# Altium PCB 3_iip_quad_uart.PcbDoc (part 2 of 2)
Units mm, origin at the board's own origin, x right, y up, seen from the top; angles counter-clockwise.
Board outline 82.5 x 28 mm, 2 copper layers (Top Layer, Bottom Layer), stack 1.571 mm thick; 55 components, 29 nets, 180 pads, 29 vias.
Unrouted connection lines stored in the file: 1.
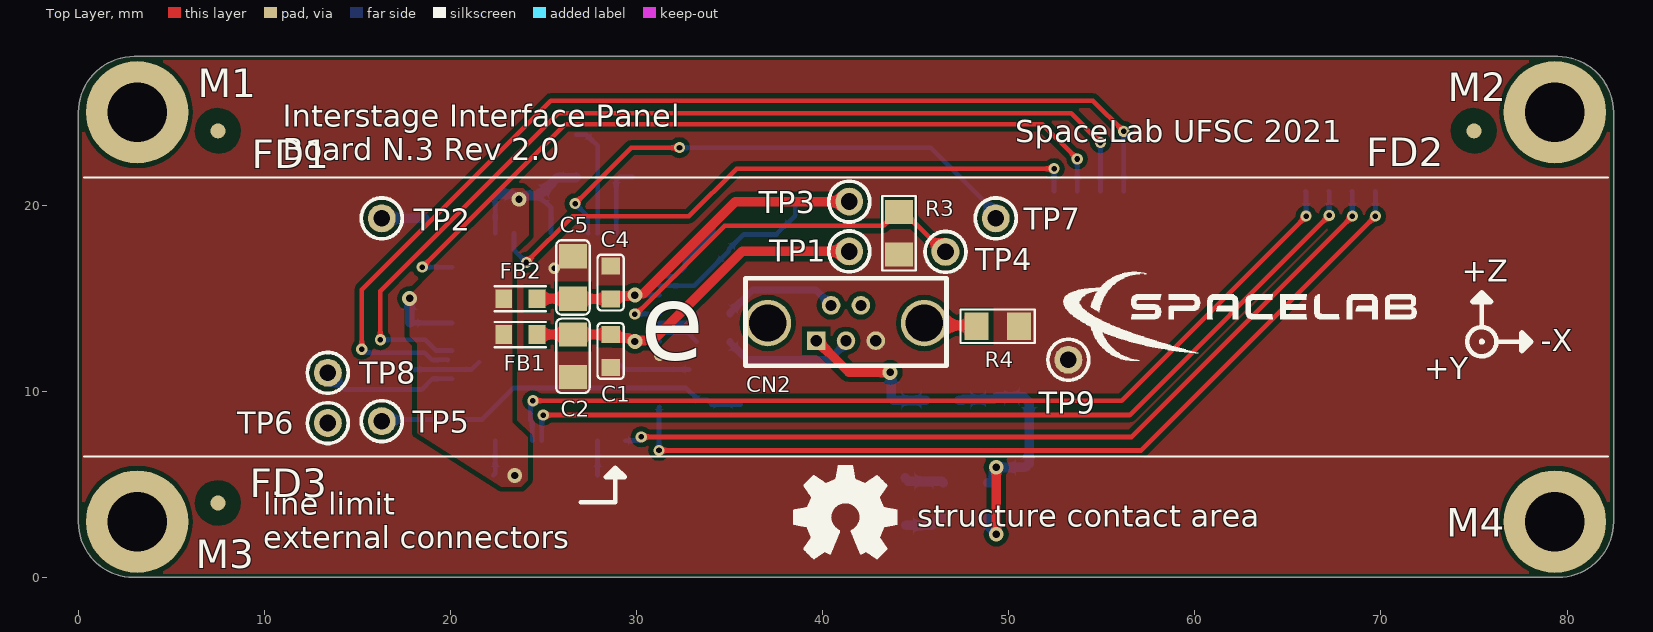
[diagram p0: Top Layer view]

## Polygon pours and split planes (outlines as drawn) (continued)
3.3V on Bottom Layer "3.3V_Borrom" (solid, pour order 22): 14.8,4.7 12.6,6.9 12.6,9.1 14.2,9.1 14.2,7.622 15.608,6.175 34.65,6.175 35.125,6.65 35.125,7.425 36.675,7.425 36.675,6.65 37.15,6.175 45.175,6.175 45.175,4.7 25.089,4.7
GND on Top Layer "Top_Layer-GND" (solid, remove dead copper, pour order 18): 0,25 cw(c3,25) 3,28 79.452,28 cw(c79.452,24.952) 82.5,24.952 82.5,3.048 cw(c79.452,3.048) 79.452,0 3.048,0 cw(c3.048,3.048) 0,3.048
3.3V on Top Layer "3.3V_TOP" (solid, pour order 6): 17.801,15.176 19.125,16.5 19.125,17.363 22.704,20.929 23.893,20.929 24.194,20.628 24.194,20.04 24.195,18.395 23.3,17.5 23.3,8.35 24.138,7.537 24.15,7.525 24.146,5.229 23.797,4.88 22.729,4.886 18.2,7.754 18.2,12.57 17.801,12.969

## Other copper
Top Layer:
  text "'.Layer_Name'" at 177.571,-11.538 h2.5
Bottom Layer:
  text "'.Layer_Name'" at 177.571,-11.538 h2.5

## Silkscreen, mask and mechanical layers (free items; w line width, h text height)
Top Overlay:
  drawing of 997 lines, arcs and shapes, not listed
  text "SpaceLab UFSC 2021" at 50.35,23.392 h1.2
  text "Interstage Interface Panel  / Board N.3 Rev 2.0" at 10.983,22.425 h1.2
  text "+Z" at 74.33,15.895 h1.2
  text "-X" at 78.58,12.145 h1.2
  text "+Y" at 72.33,10.645 h1.2
  text "e" at 30.2,10.35 h7
  text "structure contact area" at 45.071,2.724 h1.2
  text "line limit  / external connectors" at 9.925,1.575 h1.2
  text "'.Layer_Name'" at 177.571,-11.538 h2.5
Bottom Overlay:
  circle w0.254: c74.325,12.65 r0.035
  circle w0.254: c74.325,12.65 r0.785
  region: 76.35,13.15 76.85,12.65 76.35,12.15
  region: 73.825,14.675 74.325,15.175 74.825,14.675
  lines w0.254: 73.825,14.8 74.325,15.3 ; 74.325,13.435 74.325,15.3 ; 74.825,14.8 74.325,15.3 ; 75.11,12.65 76.975,12.65 ; 76.475,12.15 76.975,12.65 ; 76.475,13.15 76.975,12.65
  text "Tx2" at 67.55,18.925 h0.8 r90
  text "GND" at 51.6,18.9 h0.8 r90
  text "Rx4" at 52.825,18.9 h0.8 r90
  text "Tx4" at 54.1,18.9 h0.8 r90
  text "Rx3" at 55.4,18.9 h0.8 r90
  text "Tx3" at 56.675,18.9 h0.8 r90
  text "Tx1" at 70.125,18.9 h0.8 r90
  text "Rx2" at 66.275,18.85 h0.8 r90
  text "Rx1" at 68.85,18.85 h0.8 r90
  text "GND" at 65,18.825 h0.8 r90
  text "UART  / Board / N.2" at 47.789,16.375 h0.8
  text "UART  / Board / N.1" at 62.2,16.1 h0.8
  text "+Z" at 73.235,15.875 h1.2
  text "-X" at 77.485,12.125 h1.2
  text "-Y" at 71.235,10.625 h1.2
  text "SpaceLab UFSC 2020" at 73.65,2.225 h1.2
  text "'.Layer_Name'" at 177.571,-11.538 h2.5
Top Paste:
  text "'.Layer_Name'" at 177.571,-11.538 h2.5
Bottom Paste:
  text "'.Layer_Name'" at 177.571,-11.538 h2.5
Top Solder:
  text "'.Layer_Name'" at 177.571,-11.538 h2.5
Bottom Solder:
  text "'.Layer_Name'" at 177.571,-11.538 h2.5
Drill Guide:
  text "'.Layer_Name'" at 177.571,-11.538 h2.5
Board edge:
  lines w0.2: 0,2.962 ccw(c2.962,2.962) 2.962,0 79.515,0 ccw(c79.515,2.985) 82.5,2.985 82.5,24.998 ccw(c79.498,24.998) 79.498,28 3.225,28 2.995,28 ccw(c2.995,25.005) 0,25.005 0,23.5 0,6.5 0,2.962
  text "'.Layer_Name'" at 193.35,-11.55 h2.5
Dimensions:
  circle w0.2: c3.15,3 r1.6
  circle w0.2: c3.15,25 r1.6
  circle w0.2: c79.35,25 r1.6
  circle w0.2: c79.35,3 r1.6
  region: 39.664,5.221 40.164,5.721 40.664,5.221
  lines w0.2: 0.314,6.484 82.214,6.484 ; 0.314,21.484 82.214,21.484
  lines w0.254: 38.299,3.981 40.164,3.981 40.164,5.846 ; 39.664,5.346 40.164,5.846 ; 40.664,5.346 40.164,5.846
  text "structure contact area" at 26.389,23.534 h1.2
  text "external connectors area" at 25.139,13.334 h1.2
  text "(cm)" at 15.725,3.375 h1
  text "structure contact area" at 45.086,2.708 h1.2
  text "line limit  / external connectors" at 21.364,1.409 h1.2
  text "'.Layer_Name'" at 177.571,-11.538 h2.5
Bottom ASM:
  text "R1" at 35.425,13.975 h0.5
  text "R2" at 35.399,12.426 h0.5
  text "'.Layer_Name'" at 177.601,-11.533 h2.5
Top ASM:
  text "'.Layer_Name'" at 177.571,-11.538 h2.5
Sheet:
  drawing of 228 lines, arcs and shapes, not listed
  text "1" at 8.746,161.611 h1.78
  text "2" at 81.39,161.611 h1.78
  text "3" at 154.542,161.611 h1.78
  text "4" at 227.44,161.611 h1.78
  text "A" at -25.595,138.599 h1.78
  text "A" at 261.425,138.599 h1.78
  text "B" at -25.595,90.542 h1.78
  text "B" at 261.425,90.542 h1.78
  text "Layer" at -2.428,56.304 h1.52
  text "Name" at 7.983,56.304 h1.52
  text "Material" at 31.599,56.304 h1.52
  text "Thickness" at 53.437,56.304 h1.52
  text "Constant" at 69.943,56.304 h1.52
  text "Board Layer Stack" at 84.417,56.304 h1.52
  text "Fabrication specifications:" at 139.357,54.778 h3.1
  text "1" at -2.428,53.256 h1.52
  text "Top Overlay" at 7.983,53.256 h1.52
  text "2" at -2.428,50.208 h1.52
  text "Top Solder" at 7.983,50.208 h1.52
  text "Solder Resist" at 31.599,50.208 h1.52
  text "0.40mil" at 53.437,50.208 h1.52
  text "3.8" at 69.943,50.208 h1.52
  text "3" at -2.428,47.16 h1.52
  text "Top Layer" at 7.983,47.16 h1.52
  text "Copper" at 31.599,47.16 h1.52
  text "1.40mil" at 53.437,47.16 h1.52
  text "4" at -2.428,44.112 h1.52
  text "Dielectric 1" at 7.983,44.112 h1.52
  text "FR-4" at 31.599,44.112 h1.52
  text "59.06mil" at 53.437,44.112 h1.52
  text "4.5" at 69.943,44.112 h1.52
  text "C" at -25.595,42.028 h1.78
  text "C" at 261.425,42.028 h1.78
  text "5" at -2.428,41.064 h1.52
  text "Bottom Layer" at 7.983,41.064 h1.52
  text "Copper" at 31.599,41.064 h1.52
  text "1.40mil" at 53.437,41.064 h1.52
  text "6" at -2.428,38.016 h1.52
  text "Bottom Solder" at 7.983,38.016 h1.52
  text "Solder Resist" at 31.599,38.016 h1.52
  text "0.40mil" at 53.437,38.016 h1.52
  text "3.8" at 69.943,38.016 h1.52
  text "- Copper base: 1oz  / - PCB Material: Prepeg FR4-Standard / - PCB Tickness: 1.6mm / - PCB Surface: HASL (with lead)" at 139.351,37.794 h1.73
  text "- Silkscreen Color: White (top and bottom) / - Soldermask Color: Green / - Vias: Force Complete Tenting / - Stack-up: Table herein included / - Special requirements: None" at 197.051,37.794 h1.73
  text "7" at -2.428,34.968 h1.52
  text "Bottom Overlay" at 7.983,34.968 h1.52
  text "Assembly specifications:" at 139.632,31.798 h3.1
  text "- Solder composition: Include lead / - Fiducials: 3 top and 3 bottom avaliable" at 139.626,14.804 h1.73
  text "SpaceLab - Federal University of Santa Catarina" at 170.5,-2 h2.5
  text "D" at -25.595,-5.978 h1.78
  text "D" at 261.425,-5.978 h1.78
  text "Project:" at 170.5,-6.5 h2.5
  text "Interstage Interface Panel Nº3" at 178.5,-6.5 h2.5
  text "Layer:" at 170.5,-11.5 h2.5
  text "Designed by:" at 170.5,-16.5 h2.5
  text "Project Code:" at 228.5,-16.5 h2.5
  text "IIP3" at 243,-16.5 h2.5
  text "Yan C. de Azeredo" at 184.426,-16.533 h2.5
  text "v2.0" at 208.526,-21.433 h2.5
  text "Date:" at 170.5,-21.5 h2.5
  text "'.Print_Date'" at 176.5,-21.5 h2.5
  text "Version:" at 199.5,-21.5 h2.5
  text "Size:" at 228.5,-21.5 h2.5
  text "A4" at 234.5,-21.5 h2.5
  text "1" at 8.746,-26.349 h1.78
  text "2" at 81.39,-26.349 h1.78
  text "3" at 154.542,-26.349 h1.78
  text "4" at 227.44,-26.349 h1.78
Drill Drawing:
  circle w0.254: c-11.638,72.722 r0.722
  lines w0.254: -12.361,65.5 -10.916,65.5 -10.916,66.944 -12.361,66.944 -12.361,65.5 ; -12.361,70.194 -10.916,70.194 -11.638,68.75 -12.361,70.194 ; -12.361,75.611 -12,75.611 -11.638,75.25 -11.277,75.611 -10.916,75.611 -11.277,75.972 -10.916,76.333 -11.277,76.333 -11.638,76.694 -12,76.333 -12.361,76.333 -12,75.972 -12.361,75.611 ; -12.361,78.861 -12,78.861 -12,78.5 -11.277,78.5 -11.277,78.861 -10.916,78.861 -10.916,79.583 -11.277,79.583 -11.277,79.944 -12,79.944 -12,79.583 -12.361,79.583 -12.361,78.861 ; -12.361,81.75 -11.638,82.111 -10.916,81.75 -11.277,82.472 -10.916,83.194 -11.638,82.833 -12.361,83.194 -12,82.472 -12.361,81.75
  lines w0.381: -13.668,64.525 141.28,64.525 ; -13.668,84.025 141.28,84.025 ; -1.613,61.275 -1.613,87.275 ; 10.159,61.275 10.159,87.275 ; 35.143,61.275 35.143,87.275 ; 46.223,61.275 46.223,87.275 ; 62.242,61.275 62.242,87.275 ; 94.807,61.275 94.807,87.275 ; 107.706,61.275 107.706,87.275 ; 123.984,61.275 123.984,87.275 ; -13.668,61.275 141.28,61.275 141.28,87.275 -13.668,87.275 -13.668,61.275
  text "Symbol" at -11.718,85 h1.56
  text "Count" at -0.638,85 h1.56
  text "Hole Size" at 11.134,85 h1.56
  text "Plated" at 36.118,85 h1.56
  text "Hole Type" at 47.198,85 h1.56
  text "Drill Layer Pair" at 63.217,85 h1.56
  text "Via/Pad" at 95.782,85 h1.56
  text "Pad Shape" at 108.681,85 h1.56
  text "Template" at 124.959,85 h1.56
  text "21" at -0.638,81.75 h1.3
  text "0.300mm (11.81mil)" at 11.134,81.75 h1.3
  text "PTH" at 36.118,81.75 h1.3
  text "Round" at 47.198,81.75 h1.3
  text "Top Layer - Bottom Layer" at 63.217,81.75 h1.3
  text "Via" at 95.782,81.75 h1.3
  text "Rounded" at 108.681,81.75 h1.3
  text "(Mixed)" at 124.959,81.75 h1.3
  text "8" at -0.638,78.5 h1.3
  text "0.400mm (15.75mil)" at 11.134,78.5 h1.3
  text "PTH" at 36.118,78.5 h1.3
  text "Round" at 47.198,78.5 h1.3
  text "Top Layer - Bottom Layer" at 63.217,78.5 h1.3
  text "Via" at 95.782,78.5 h1.3
  text "Rounded" at 108.681,78.5 h1.3
  text "v80h40m0mx0" at 124.959,78.5 h1.3
  text "5" at -0.638,75.25 h1.3
  text "0.600mm (23.62mil)" at 11.134,75.25 h1.3
  text "PTH" at 36.118,75.25 h1.3
  text "Round" at 47.198,75.25 h1.3
  text "Top Layer - Bottom Layer" at 63.217,75.25 h1.3
  text "Pad" at 95.782,75.25 h1.3
  text "(Mixed)" at 108.681,75.25 h1.3
  text "(Mixed)" at 124.959,75.25 h1.3
  text "9" at -0.638,72 h1.3
  text "0.900mm (35.43mil)" at 11.134,72 h1.3
  text "PTH" at 36.118,72 h1.3
  text "Round" at 47.198,72 h1.3
  text "Top Layer - Bottom Layer" at 63.217,72 h1.3
  text "Pad" at 95.782,72 h1.3
  text "Rounded" at 108.681,72 h1.3
  text "c150h90" at 124.959,72 h1.3
  text "2" at -0.638,68.75 h1.3
  text "2.000mm (78.74mil)" at 11.134,68.75 h1.3
  text "PTH" at 36.118,68.75 h1.3
  text "Round" at 47.198,68.75 h1.3
  text "Top Layer - Bottom Layer" at 63.217,68.75 h1.3
  text "Pad" at 95.782,68.75 h1.3
  text "Rounded" at 108.681,68.75 h1.3
  text "c250h200" at 124.959,68.75 h1.3
  text "4" at -0.638,65.5 h1.3
  text "3.200mm (125.98mil)" at 11.134,65.5 h1.3
  text "PTH" at 36.118,65.5 h1.3
  text "Round" at 47.198,65.5 h1.3
  text "Top Layer - Bottom Layer" at 63.217,65.5 h1.3
  text "Pad" at 95.782,65.5 h1.3
  text "Rounded" at 108.681,65.5 h1.3
  text "c550h320" at 124.959,65.5 h1.3
  text "49 Total" at -0.638,62.25 h1.3
  text "'.Layer_Name'" at 177.571,-11.538 h2.5
  text "'.Layer_Name'" at 177.571,-11.538 h2.5

## Dimensions
2.882,27.982 to 2.882,21.482 on Dimensions
3.15,3 to 20.875,3.15 on Dimensions
0,0 to 0,28 on Dimensions
0,28 to 82.5,28 on Dimensions
3.15,3 to 79.35,3 on Dimensions
82.2,21.5 to 82.2,6.5 on Dimensions
82.2,6.5 to 82.5,0 on Dimensions

## Text inside footprints (layer, text, board x,y; h text height)
CN1: Bottom Overlay "1" at 63.175,20.25 h1 r180
CN3: Bottom Overlay "1" at 49.65,20.25 h1 r180